# Altium PCB LG6.PcbDoc
Units mm, origin at the board's own origin, x right, y up, seen from the top; angles counter-clockwise.
Board outline 30 x 30 mm, 2 copper layers (Top Layer, Bottom Layer), stack 1.57 mm thick; 13 components, 10 nets, 34 pads, 9 vias.
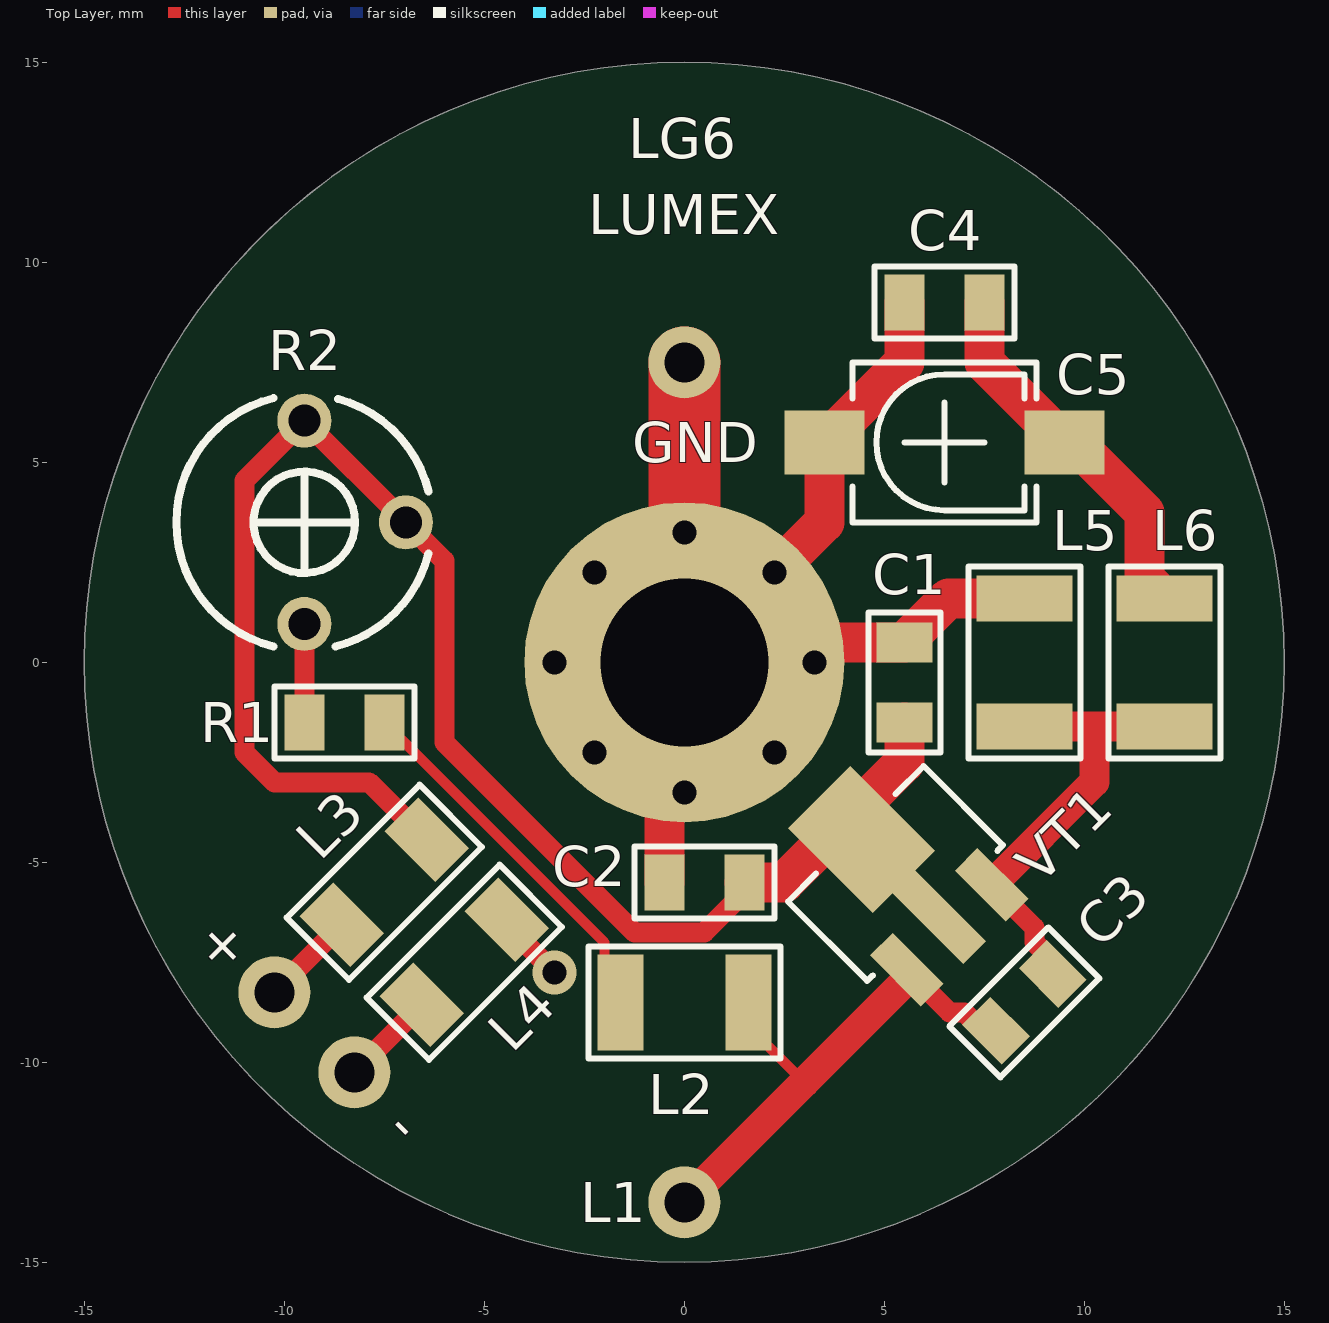
[diagram p0: Top Layer view]
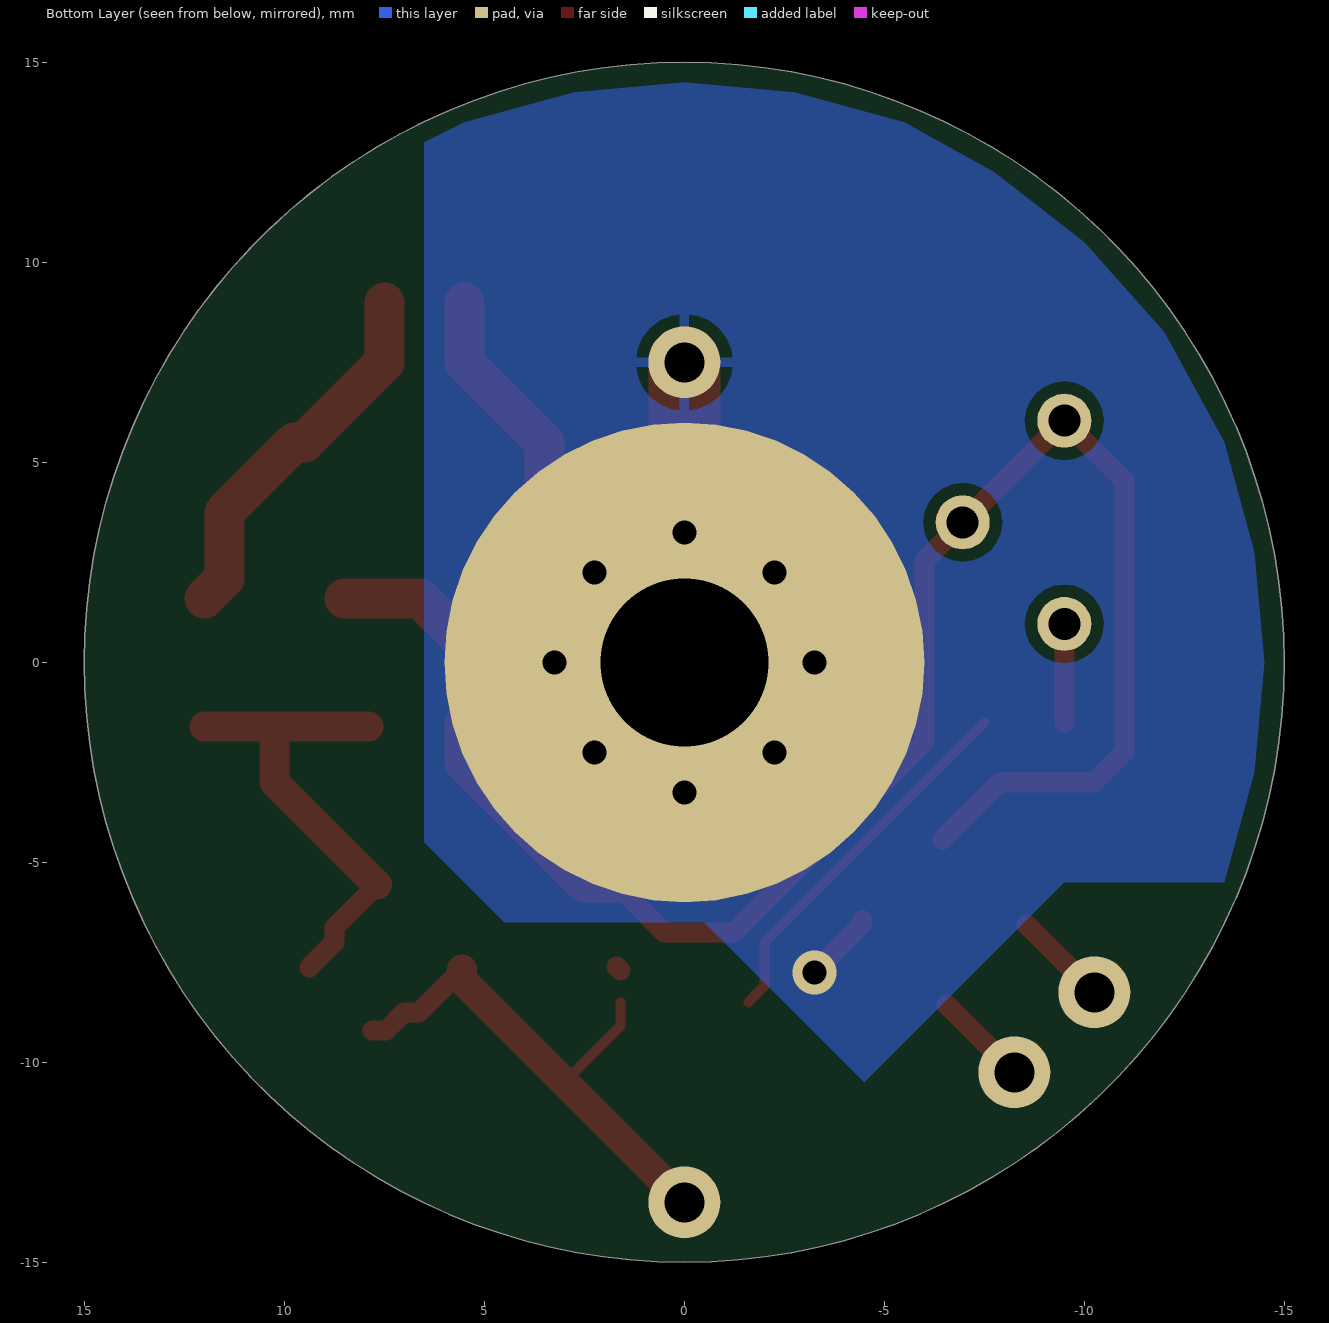
[diagram p1: Bottom Layer view, seen from below]

## Layer stack, top to bottom
Top Layer: signal copper 0.035
Dielectric: core 1.5, FR-4, Dk 4.8
Bottom Layer: signal copper 0.035

## Board outline
-15,0 ccw(c0,0) 0,-15 ccw(c0,0) 15,0 ccw(c0,0) 0,15 ccw(c0,0)

## Design rules (kind name [scope] priority, off if disabled: settings)
Clearance [All] p1: gap=0.3
ComponentClearance [All] p1: gap=0.25 collisioncheckmode=3 verticalgap=0.25 showdistances=FALSE
FabricationTestPointUsage TestPointUsage [All] p1: valid=2 allowmultiple=FALSE
FabricationTestpoint Testpoint [All] p1: side=3 testpointundercomponent=TRUE minsize=1.016 maxsize=2.54 preferedsize=1.524 minholesize=0 maxholesize=1.016 preferedholesize=0.813 testpointgrid=0.025 allowsidetop=TRUE allowsidebottom=TRUE usegrid=TRUE gridtolerance=0
HoleSize [All] p1: absolutevalues=TRUE maxlimit=10 minlimit=0.4 maxpercent=80.000 minpercent=20.000
HoleToHoleClearance [All] p1: gap=1 allowstackedmicrovias=TRUE
MinimumSolderMaskSliver [All] p1: minsoldermaskwidth=0.2
PlaneClearance [All] p1: clearance=0.5
PlaneConnect [All] p1: planeconnectstyle=Direct reliefexpansion=0.5 reliefentries=4 reliefconductorwidth=0.3 reliefairgap=0.3
PolygonConnect Pad-Poly_Direct_Connect [InPadClass('Pad-Poly_Direct_Connect') vs InNet('GND')] p1: connectstyle=Direct reliefconductorwidth=0.254 reliefentries=4 polygonreliefangle="90 Angle"
PolygonConnect PolygonConnect_Vias [IsVia] p2: connectstyle=Direct reliefconductorwidth=0.254 reliefentries=4 polygonreliefangle="90 Angle"
PolygonConnect [All] p3: connectstyle=Relief reliefconductorwidth=0.25 reliefentries=4 polygonreliefangle="90 Angle"
RoutingVias [All] p1: holewidth=0.4 width=0.9 viastyle="Through Hole" minholewidth=0.4 minwidth=0.9 maxholewidth=0.6 maxwidth=1.1
SilkToSilkClearance [All] p1: silktosilkclearance=0.25
SilkscreenOverComponentPads [All] p1: minsilkscreentomaskgap=0.2
SolderMaskExpansion [All] p1: expansion=0.1
Width [All] p1: maxlimit=2.5 minlimit=0.25 preferedwidth=0.25 minimp=50.000000 maximp=50.000000 favimp=50.000000
18 further rules are at their usual default settings.

## Classes and differential pairs
pad class Pad-Poly_Direct_Connect: Free-0

## Components (designator, comment, footprint, x,y, rotation, side; value= is the part's Value field where it differs from the comment)
C1 "CER" C_0805_0.9 5.5,-0.5 r270 top
C2 "CER" C_0805_0.6 0.5,-5.5 r0 top
C3 "CER" C_0805_0.6 8.5,-8.5 r45 top
C4 "CER" C_0805_0.6 6.5,9 r0 top
C5 "C_Trimmer" TZB4-B 6.5,5.5 r0 top
L2 "Inductor_1" L_1210_2 0,-8.5 r0 top
L3 "EMI_Suppressor" L_1206_1.25 -7.5,-5.5 r225 top
L4 "EMI_Suppressor" L_1206_1.25 -5.5,-7.5 r225 top
L5 "Inductor_1" L_1210_2 8.5,0 r90 top
L6 "Inductor_1" L_1210_2 12,0 r90 top
R1 "Resistor" R_0805 -8.5,-1.5 r0 top
R2 "R_Variable" RJ50 -9.5,3.5 r270 top
VT1 "1_NPN_SOT89" SOT-89 5.278,-5.278 r45 top

## Footprints (in the part's own frame and the unit in brackets; to place one, negate y for a bottom-side part, rotate by r counter-clockwise, add the part's x,y. Pads: shape width x height; smd on the part's side, far side on the other; paste and mask are expansions set on the pad)
C_0805_0.6 [mm] "Capacitor, thickness 0.6 mm"
  rect 1x1.4 smd: 1(-1,0) 2(1,0)
  silkscreen extent -1.75,-0.9 1.75,0.9, body extent -1,-0.6 1,0.6, height 0.6
C_0805_0.9 [mm] "Capacitor, thickness 0.9 mm"
  rect 1x1.4 smd: 1(-1,0) 2(1,0)
  silkscreen extent -1.75,-0.9 1.75,0.9, body extent -1,-0.6 1,0.6, height 0.9
L_1206_1.25 [mm] "EMI Suppression Inductor, thickness 1.25mm"
  rect 1.2x1.8 smd: 1(-1.5,0) 2(1.5,0)
  silkscreen extent -2.35,-1.1 2.35,1.1, body extent -1.6,-0.8 1.6,0.8, height 1.25
L_1210_2 [mm] "3.2 x 2.5 mm"
  rect 1.15x2.4 smd: 1(-1.6,0) 2(1.6,0)
  silkscreen extent -2.4,-1.4 2.4,1.4, body extent -1.65,-1.25 1.65,1.25, height 1.99
R_0805 [mm] "Resistor"
  rect 1x1.4 smd: 1(-1,0) 2(1,0)
  silkscreen extent -1.75,-0.9 1.75,0.9, body extent -1,-0.6 1,0.6, height 0.46
RJ50 [mm] "Trimming Potentiometer, Bourns"
  round 1.35 hole 0.8: 1(-2.54,0) 2(0,2.54) 3(2.54,0)
  silkscreen extent -3.1,-3.2 3.1,3.1, body extent -3.17,-3.19 3.2,3.19, height 5.8
SOT-89 [mm]
  rect 0.8x1.8 smd: 1(-1.5,-1.9) 3(1.5,-1.9)
  rect 2.2x3 smd: 2(0,1.2)
  rect 0.8x2.5 smd: 2(0,-1.55)
  silkscreen extent -2.4,-1.4 2.4,1.4, body extent -2.3,-2.3 2.3,2.2, height 1.5
TZB4-B [mm] "Trimmer Capacitor Murata"
  rect 2x1.6 smd: 1(-3,0) 2(3,0)
  silkscreen extent -2.3,-2 2.3,2, body extent -3.5,-2 3.5,2, height 3.1

## Part data
C1 C2 C3 C4: library part C_Ceramic, "Capacitor"
C5: "Capacitor"
L2 L5 L6: "Coreless Inductor"
L3 L4: "Inductive EMI Suppressor"
R1: "Constant"
R2: "Resistor"

## Free pads (board coordinates)
  round 8 / inner round 7.5 / far side round 12 hole 4.2: 0(0,0)
  round 1.8 hole 1: 1(0,-13.5) 2(-10.25,-8.25) 3(-8.25,-10.25) 4(0,7.5)

## Via types
v1: diameter 1.1, hole 0.6, Top Layer to Bottom Layer, tented both sides, 9 vias

## Nets (pads, with @x,y where several pads share a name; then routed paths per layer and width w, separated by ;. In a path a pad name is that pad's centre, name@x,y a point inside that pad or via, vN(x,y) a via of type N, cw(c..) or ccw(c..) an arc to the next point about the centre after c; other vN are vias at no path point)
+: L3.2 pad.2 | length 2.4
  Top Layer w0.5: pad.2 L3.2
-: L4.2 pad.3 | length 2.4
  Top Layer w0.5: pad.3 L4.2
GND: C1.1 C2.1 C4.1 C5.1 L4.1 L5.2 pad.0 pad.4 | length 35.2
  Top Layer w0.254: pad.0@3.211,0.5 cw(c0,0) v1(3.25,0)
  Top Layer w0.5: L4.1 -4.439,-6.561 v1(-3.25,-7.75)
  Top Layer w1: C2.1 -0.5,-0.5 pad.0 pad.0@0.5,0.5 ; C4.1 5.5,7.5 C5.1 3.5,3.5 v1(2.25,2.25) pad.0@0.5,0.5 ; L5.2 6.6,1.6 C1.1 3.211,0.5 pad.0@0.5,0.5
  Top Layer w1.8: pad.0 v1(0,3.25) pad.4
  other v1: 0,-3.25 -2.25,-2.25 2.25,-2.25 -3.25,0 -2.25,2.25
NetC1_2: C1.2 C2.2 L3.1 R2.1 R2.2 VT1.2 | length 40.2
  Top Layer w0.25: C2.2@1.5,-5.75 C2.2
  Top Layer w0.5: L3.1 -7.879,-3 -10.25,-3 -11,-2.25 -11,4.54 R2.1 R2.2 -6,2.54 -6,-2 -1.25,-6.75 0.5,-6.75 C2.2@1.5,-5.75
  Top Layer w1: C2.2 2.5,-5.5 5.5,-2.5 C1.2
NetC3_1: C3.1 L2.2 pad.1 VT1.1 | length 13.7
  Top Layer w0.25: L2.2 1.6,-9.1 3,-10.5
  Top Layer w0.5: L2.2@1.6,-7.7 L2.2@1.7,-7.6 ; VT1.1 6.629,-8.75 7,-8.75 7.457,-9.207 C3.1
  Top Layer w0.75: pad.1 3,-10.5 5.561,-7.939 VT1.1
NetC3_2: C3.2 L5.1 L6.1 VT1.3 | length 11.9
  Top Layer w0.5: VT1.3 8.75,-6.629 8.75,-7 C3.2@9.375,-7.625
  Top Layer w0.75: VT1.3 10.25,-2.993 10.25,-1.6 ; L5.1@7.9,-1.6 L5.1 10.25,-1.6 ; L6.1 10.25,-1.6
NetC4_2: C4.2 C5.2 L6.2 | length 9.4
  Top Layer w1: C4.2 7.5,7.5 C5.2 9.75,5.5 11.5,3.75 11.5,2.1 L6.2
NetHL1_1: 
NetL2_1: L2.1 R1.2 | length 9.4
  Top Layer w0.25: R1.2 -2,-7 -2,-8.1 L2.1
NetR1_1: R1.1 R2.3 | length 2.5
  Top Layer w0.5: R1.1 R2.3

## Polygon pours and split planes (outlines as drawn)
GND on Bottom Layer "GND" (solid, remove dead copper, pour order 3): 0,14.5 -2.75,14.25 -5.5,13.5 -7.75,12.25 -10,10.5 -12,8.25 -13.5,5.5 -14.25,2.75 -14.5,0 -14.25,-2.75 -13.5,-5.5 -9.5,-5.5 -4.5,-10.5 -0.5,-6.5 4.5,-6.5 6.5,-4.5 6.5,13 5.5,13.5 2.75,14.25

## Silkscreen, mask and mechanical layers (free items; w line width, h text height)
Top Overlay:
  text "LG6" at -1.4,12.6 h1
  text "LUMEX" at -2.4,10.7 h1
  text "GND" at -1.3,5 h1
  text "+" at -12.25,-7 h1 r315
  text "-" at -7.5,-11.75 h1 r315
  text "L1" at -2.6,-14 h1
Mechanical 4:
  circle w0.1: c0,0 r15